# EAGLE board superlna (EAGLE 7.7.0)
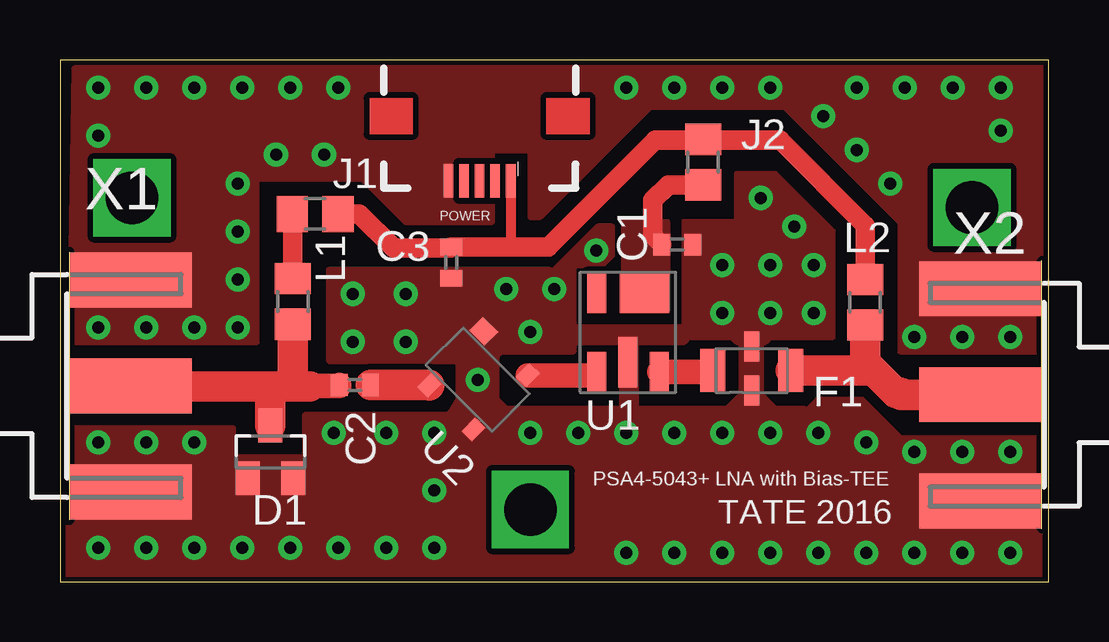
[diagram p0: board, top side]
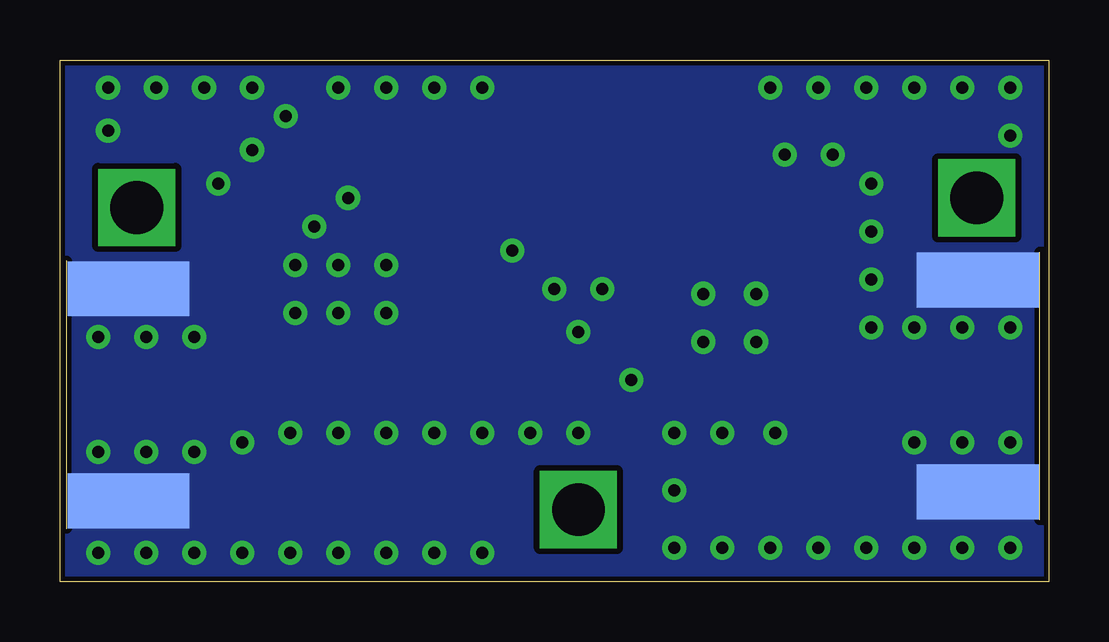
[diagram p1: board, bottom side, seen from below]

Size 41.2 x 21.75 mm. Coordinates in mm from the lower left corner, seen from the top.
Outline: 0,0 41.2,0 41.2,21.75 0,21.75 0,0
Copper layers (1*16): Top 0.035mm / dielectric 1.5mm / Bottom 0.035mm
Design rules "SparkFun-2-layer-STANDARD *": minimum track width 10mil, minimum drill 13mil, track to track 10mil, track to pad 8mil, pad to pad 8mil, via to via 10mil, smd to smd 8mil, copper to edge 8mil, drill to drill 8mil, minimum pad ring 10mil, minimum via ring 10mil, stop-mask expansion 4mil, vias tented up to drill 25mil, thermal gap 10mil

## Footprints (pad centres in the part's own frame; a part is rotated, then mirrored left to right if it is on the bottom)
C0402 = smd 0.7 x 0.9: 1 -0.65,0; 2 0.65,0
SOT23 = smd 1 x 1.4: 1 -0.95,-1.1; 2 0.95,-1.1; 3 0,1.1
FV1206 = smd 0.61 x 1.245: G1 0,-0.915; G2 0,0.915 | smd 1.04 x 1.8: RFIN -1.63,-0.09; RFOUT 1.63,-0.09
R0805 = smd 1.3 x 1.5: 1 -0.95,0; 2 0.95,0
USB-MICRO-SMD = smd 1.4 x 0.4: D+1 2.7,0; D-1 2.7,0.65; GND1 2.7,-1.3; ID1 2.7,-0.65; VBUS1 2.7,1.3
GU1414 = smd 0.79 x 1.68: 1 -1.3,-1.65; 2 1.3,-1.65; NC -1.3,1.65 | smd 2.06 x 1.68: 3 0.7,1.65 | smd 0.79 x 2.11: GND 0,-1.24
SOC-343 = smd 0.9 x 0.8: GND 1.3,-1.6 | smd 0.6 x 0.8: GND1 -1.3,1.6; RFIN 1.3,1.6; RFOUT_DCIN -1.3,-1.6
J502-ND-142-0701-801/806 = smd 5.08 x 2.286: 1 2.565,0; G@1 2.565,4.42; G@2 2.565,-4.42 | smd 5.08 x 2.286 bottom: G@3 2.565,4.42; G@4 2.565,-4.42

## Placement (x,y rotation side)
C1  [C0402]  25.72,14.05 0 top
C2  [C0402]  12.29,8.2 180 top
C3  [C0402]  16.3,13.3 270 top
D1  BAV199  [SOT23]  8.77,5.41 0 top
F1  BANDPASS  [FV1206]  28.82,8.89 0 top
J1  [R0805]  10.63,15.33 180 top
J2  [R0805]  26.8,17.49 270 top
L1  [R0805]  9.7,11.68 90 top
L2  [R0805]  33.55,11.65 270 top
POWER  [USB-MICRO-SMD]  17.48,19.41 270 top
U1  BIASTEE  [GU1414]  23.66,10.39 0 top
U2  AMP  [SOC-343]  17.44,8.39 135 top
X1  SMA-142-0701-801/806  [J502-ND-142-0701-801/806]  0.39,8.16 0 top
X2  SMA-142-0701-801/806  [J502-ND-142-0701-801/806]  40.91,7.79 180 top

## Library data of the parts
C1-C3 J1 J2 L1 L2 = rcl
D1 = diode
F1 U2 = custom
POWER = microusb
U1 = minicircuits
X1 X2 = con-coax; MF: JOHNSON COMPONENTS; MPN: 142-0701-801; OC_FARNELL: 1608592; OC_NEWARK: 90F2624

## Nets
BIASPOWER: C1.1 J2.2 U1.3
GND: C1.2 C3.2 D1.1 D1.2 F1.G1 F1.G2 POWER.GND1 U1.GND U2.GND U2.GND1 X1.G@1 X1.G@2 X1.G@3 X1.G@4 X2.G@1 X2.G@2 X2.G@3 X2.G@4
N$2: C2.1 U2.RFIN
N$4: C3.1 J1.1 J2.1 L2.1 POWER.VBUS1
N$5: U1.1 U2.RFOUT_DCIN
N$6: F1.RFIN U1.2
N$7: J1.2 L1.2
RFIN: C2.2 D1.3 L1.1 X1.1
RFOUT: F1.RFOUT L2.2 X2.1

## Tracks (layer width: path | path; a pad name or v marks a point on that pad's centre or on a via)
BIASPOWER
  Top 0.813: J2.2 25.34,16.54 24.7,15.9 24.7,14.42 C1.1
  pour Top (rank 2, no thermals): 25.3,15 25.3,11.3 23.5,11.3 23.5,15
GND  (via drill 0.5 pad 0.25, 0.5 pad 0.41)
  other vias: 1.6,5.8 3.6,5.8 5.6,5.8 1.6,1.4 3.6,1.4 5.6,1.4 7.6,1.4 9.6,1.4 13.6,1.4 11.6,1.4 11.4,6.2 15.6,1.4 13.6,6.2 15.6,6.2 17.4,8.4 19.6,6.2 21.6,6.2 23.6,6.2 25.6,6.2 27.6,6.2 29.6,6.2 31.6,6.2 33.6,5.8 35.6,5.4 37.6,5.4 39.6,5.4 39.6,1.2 37.6,1.2 35.6,1.2 33.6,1.2 31.6,1.2 29.6,1.2 27.6,1.2 25.6,1.2 23.6,1.2 22.35,13.8 15.6,3.8 1.6,10.6 3.6,10.6 5.6,10.6 7.4,10.6 7.4,12.6 7.4,14.6 7.4,16.6 9,17.8 11,17.8 12.2,12 12.2,10 14.4,10 14.4,12 19.6,10.4 20.6,12.2 18.6,12.2 1.6,20.6 1.6,18.6 3.6,20.6 5.6,20.6 7.6,20.6 9.6,20.6 11.6,20.6 23.6,20.6 25.6,20.6 27.6,20.6 29.6,20.6 31.8,19.4 33.2,18 34.6,16.6 39.6,10.2 37.6,10.2 35.6,10.2 29.6,11.2 27.6,11.2 31.4,11.2 31.4,13.2 29.6,13.2 29.2,16 30.6,14.8 27.6,13.2 33.2,20.6 35.2,20.6 37.2,20.6 39.2,20.6 39.2,18.8
  pour Bottom (no thermals): 0,0 41,0 41,21.5 0,21.5
  pour Top (no thermals): 28.4,10 29.2,10 29.2,7.8 28.4,7.8
  pour Top (no thermals): 24,7.4 24,10 26,10 26.2,10.2 28.2,10.2 28.2,12.8 28.2,13.4 26,13.4 26,10.8 26,10.6 21.4,10.6 21.4,13.2 22.6,13.2 23,13.6 23,14.8 22.4,14.8 20.4,12.8 20.4,9.6 21.4,9.6 21.4,10 23.4,10 23.4,7.4
  pour Top (no thermals): 26,15 26,13.4 26,12.2 28.2,10 29.4,10 29.6,10.2 32.2,10.2 32.2,14.6 29.8,17 28.2,17 28.2,15
  pour Top (no thermals): 11.2,9.2 16.6,9.2 16.6,7.6 16.2,6.95 10.2,6.95 10.2,5.4 31,5.4 31,7.2 29.8,7.2 29.2,7.8 28.4,7.8 27.8,7.2 18.6,7.2 18.2,7.6 18.2,9.4 18.4,9.6 20.4,9.6 20.4,13 11.2,13
  pour Top (no thermals): 0.2,0.2 0.2,6.4 7.2,6.4 7.2,5.2 31,5.2 31.2,5.4 31.2,7.2 31.6,7.6 33.4,7.6 34.8,6.2 35,6 40.8,6 40.8,0.4 40.8,0.2
  pour Top (no thermals): 0.4,10 8.2,10 8.2,16.8 12.6,16.8 14.4,15 18,15 18,18 19.6,18 19.6,15.2 20,15.2 24.6,19.8 30.2,19.8 35,15 35,9.6 40.8,9.6 41,9.8 41,21.4 0.6,21.4
N$2
  Top 1.27: C2.1 15.39,8.2 U2.RFIN
N$3  (via drill 2.2 pad 2.54)
  other vias: 3,16
N$4
  Top 0.305: 18.78,14.03 18.7,13.95
  Top 0.406: POWER.VBUS1 18.78,14.03
  Top 0.813: J1.1 12.47,15.33 13.9,13.9 16.25,13.9 C3.1 18.7,13.95 20.35,13.95 24.8,18.4 26.76,18.4 J2.1 26.84,18.4 30,18.4 33.55,14.85 L2.1
N$5
  Top 0.813: 22.22,8.6 U1.1
  Top 1.016: U2.RFOUT_DCIN 22.22,8.6
N$6
  Top 0.813: 27.13,8.74 F1.RFIN
  Top 1.016: U1.2 27.13,8.74
N$7
  Top 0.813: L1.2 9.7,15.31 J1.2
N$8  (via drill 2.2 pad 2.54)
  other vias: 38,15.6
N$9  (via drill 2.2 pad 2.54)
  other vias: 19.6,3
RFIN
  Top 0.61: D1.3 8.75,6.74
  Top 0.813: L1.1 9.6,10.73 | 8.75,6.74 8.8,6.74
  Top 1.016: C2.2 11.64,8.16 10.41,8.16 10.41,8.13
  Top 1.27: 10.41,8.13 9.7,8.13 | 9.7,8.13 L1.1 | 9.7,8.13 8.77,8.13 | 8.77,8.13 D1.3 | 8.77,8.13 2.96,8.13 X1.1
RFOUT
  Top 1.27: F1.RFOUT 33.55,8.8 33.55,9.14 | 33.55,9.14 L2.2 | X2.1 35.05,7.79 35.05,7.87 34.82,7.87 33.55,9.14

## Text on the board
tPlace: PSA4-5043+ LNA with Bias-TEE | TATE 2016